# EAGLE board 20160621_DWC_LSM9DS1 (EAGLE 7.2.0)
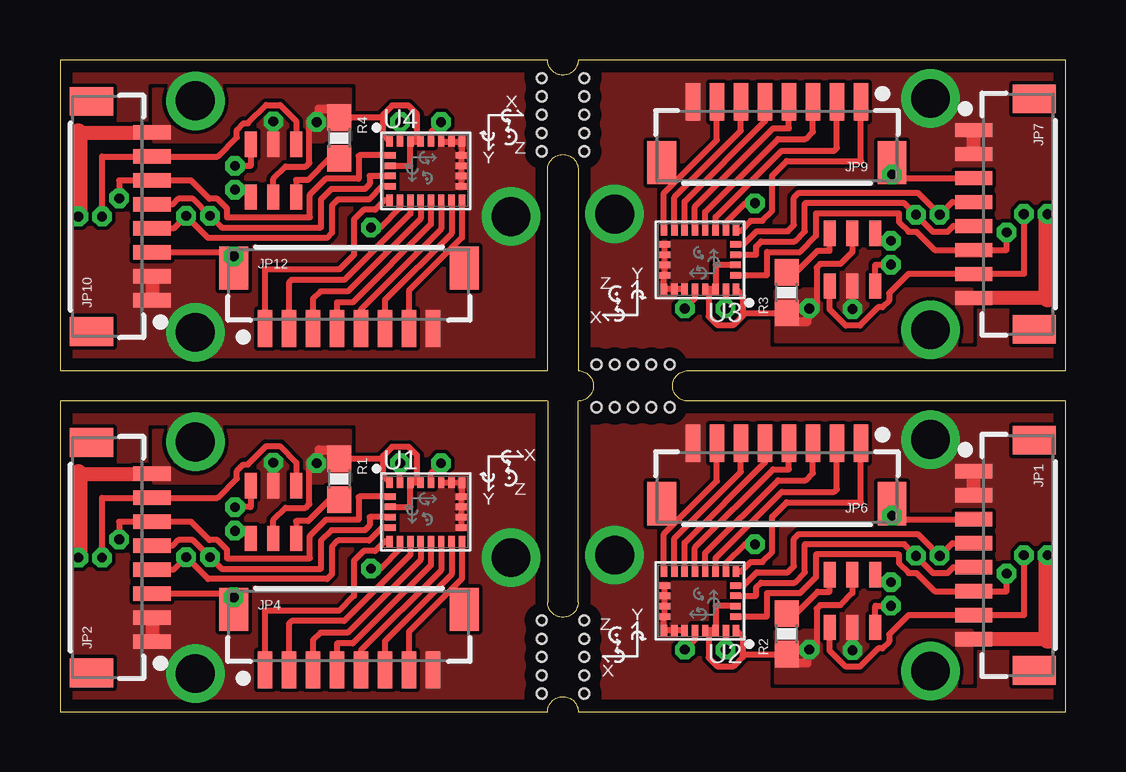
[diagram p0: board, top side]
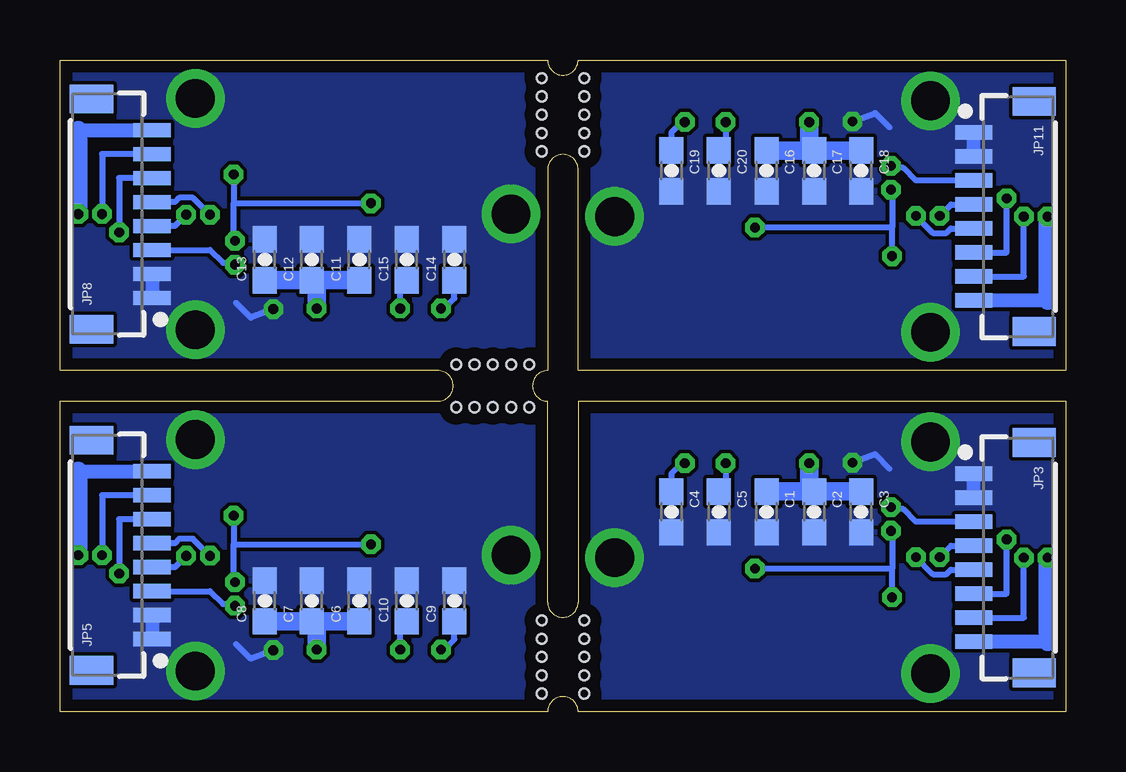
[diagram p1: board, bottom side, seen from below]

Size 41.91 x 27.18 mm. Coordinates in mm from the lower left corner, seen from the top.
Outline: 0,0 20.32,0 arc-180 21.59,0 41.91,0 41.91,12.95 26.16,12.95 arc-180 26.16,14.22 41.91,14.22 41.91,27.18 21.59,27.18 arc-180 20.32,27.18 0,27.18 0,14.22 20.32,14.22 20.32,22.61 arc-180 21.59,22.61 21.59,14.22 arc-180 21.59,12.95 21.59,4.57 arc-180 20.32,4.57 20.32,12.95 0,12.95 0,0
Copper layers (1*16): Top 0.0178mm / dielectric 59mil / Bottom 0.0178mm
Design rules "sunstone-2lyr_v1.0.0.3 *": minimum track width 6mil, minimum drill 14mil, track to track 6mil, track to pad 6mil, pad to pad 6mil, via to via 6mil, smd to smd 6mil, copper to edge 20mil, drill to drill 16mil, minimum pad ring 8mil, minimum via ring 8mil, stop-mask expansion 3mil, vias tented up to drill 0mil, thermal gap 0mil
Holes 0.41 mm at 20.07,26.42 20.07,25.65 20.07,24.89 20.07,24.13 20.07,23.37 21.84,26.42 21.84,25.65 21.84,24.89 21.84,24.13 21.84,23.37 22.35,14.48 23.11,14.48 23.88,14.48 24.64,14.48 25.4,14.48 22.35,12.7 23.11,12.7 23.88,12.7 24.64,12.7 25.4,12.7 20.07,0.76 20.07,1.52 20.07,2.29 20.07,3.05 20.07,3.81 21.84,0.76 21.84,1.52 21.84,2.29 21.84,3.05 21.84,3.81

## Footprints (pad centres in the part's own frame; a part is rotated, then mirrored left to right if it is on the bottom)
0603-CAP = smd 1.1 x 1: 1 -0.85,0; 2 0.85,0
BM08B-SRSS-TB = smd 0.6 x 1.55: 1 -3.5,0; 2 -2.5,0; 3 -1.5,0; 4 -0.5,0; 5 0.5,0; 6 1.5,0; 7 2.5,0; 8 3.5,0 | smd 1.2 x 1.8: P$9 4.8,2.525; P$10 -4.8,2.525
0603-RES = smd 1.1 x 1: 1 -0.85,0; 2 0.85,0
LGA24-8X4 = smd 0.27 x 0.45: 1 -1.505,1.225; 6 -1.505,-1.225; 7 -1.075,-1.225; 8 -0.645,-1.225; 9 -0.215,-1.225; 10 0.215,-1.225; 11 0.645,-1.225; 12 1.075,-1.225; 13 1.505,-1.225; 18 1.505,1.225; 19 1.075,1.225; 20 0.645,1.225; 21 0.215,1.225; 22 -0.215,1.225; 23 -0.645,1.225; 24 -1.075,1.225 | smd 0.45 x 0.27: 2 -1.475,0.645; 3 -1.475,0.215; 4 -1.475,-0.215; 5 -1.475,-0.645; 14 1.475,-0.645; 15 1.475,-0.215; 16 1.475,0.215; 17 1.475,0.645
SN74LVC1G175 = smd 0.5 x 1.05: P1 -0.95,-1.1; P2 0,-1.1; P3 0.95,-1.1; P4 0.95,1.1; P5 0,1.1; P6 -0.95,1.1

## Placement (x,y rotation side)
C1  0.1uF  [0603-CAP]  12.47,8.33 270 bottom
C2  0.1uF  [0603-CAP]  10.49,8.33 270 bottom
C3  10uF  [0603-CAP]  8.53,8.33 270 bottom
C4  10nF  [0603-CAP]  16.43,8.33 270 bottom
C5  0.1uF  [0603-CAP]  14.45,8.33 270 bottom
C6  0.1uF  [0603-CAP]  29.44,4.62 90 bottom
C7  0.1uF  [0603-CAP]  31.42,4.62 90 bottom
C8  10uF  [0603-CAP]  33.38,4.62 90 bottom
C9  10nF  [0603-CAP]  25.48,4.62 90 bottom
C10  0.1uF  [0603-CAP]  27.46,4.62 90 bottom
C11  0.1uF  [0603-CAP]  29.44,18.85 90 bottom
C12  0.1uF  [0603-CAP]  31.42,18.85 90 bottom
C13  10uF  [0603-CAP]  33.38,18.85 90 bottom
C14  10nF  [0603-CAP]  25.48,18.85 90 bottom
C15  0.1uF  [0603-CAP]  27.46,18.85 90 bottom
C16  0.1uF  [0603-CAP]  12.47,22.56 270 bottom
C17  0.1uF  [0603-CAP]  10.49,22.56 270 bottom
C18  10uF  [0603-CAP]  8.53,22.56 270 bottom
C19  10nF  [0603-CAP]  16.43,22.56 270 bottom
C20  0.1uF  [0603-CAP]  14.45,22.56 270 bottom
JP1  [BM08B-SRSS-TB]  38.07,6.53 270 top
JP2  [BM08B-SRSS-TB]  3.84,6.43 90 top
JP3  [BM08B-SRSS-TB]  3.84,6.43 270 bottom
JP4  [BM08B-SRSS-TB]  12.04,1.75 0 top
JP5  [BM08B-SRSS-TB]  38.07,6.53 90 bottom
JP6  [BM08B-SRSS-TB]  29.87,11.2 180 top
JP7  [BM08B-SRSS-TB]  38.07,20.75 270 top
JP8  [BM08B-SRSS-TB]  38.07,20.75 90 bottom
JP9  [BM08B-SRSS-TB]  29.87,25.43 180 top
JP10  [BM08B-SRSS-TB]  3.84,20.65 90 top
JP11  [BM08B-SRSS-TB]  3.84,20.65 270 bottom
JP12  [BM08B-SRSS-TB]  12.04,15.98 0 top
R1  [0603-RES]  11.63,9.7 270 top
R2  [0603-RES]  30.28,3.25 90 top
R3  [0603-RES]  30.28,17.48 90 top
R4  [0603-RES]  11.63,23.93 270 top
U1  LSM9DS1  [LGA24-8X4]  15.24,8.33 0 top
U2  LSM9DS1  [LGA24-8X4]  26.67,4.62 180 top
U3  LSM9DS1  [LGA24-8X4]  26.67,18.85 180 top
U4  LSM9DS1  [LGA24-8X4]  15.24,22.56 0 top
U$1  SN74LVC1G175  [SN74LVC1G175]  8.89,8.33 180 top
U$2  SN74LVC1G175  [SN74LVC1G175]  33.02,4.62 0 top
U$3  SN74LVC1G175  [SN74LVC1G175]  33.02,18.85 0 top
U$4  SN74LVC1G175  [SN74LVC1G175]  8.89,22.56 180 top

## Library data of the parts
C1-C20 R1-R4 = SparkFun-Passives
JP1-JP12 = SparkFun-Connectors
U1-U4 = SparkFun-Sensors; PROD_ID: IC-12536
U$1-U$4 = CSL_Components

## Nets
CS_A/G: JP2.3 U1.7 U$1.P4
CS_A/G1: JP1.3 U2.7 U$2.P4
CS_A/G2: JP7.3 U3.7 U$3.P4
CS_A/G3: JP10.3 U4.7 U$4.P4
CS_M: JP4.2 U1.8
CS_M1: JP6.2 U2.8
CS_M2: JP9.2 U3.8
CS_M3: JP12.2 U4.8
CSCLK: JP2.7 JP3.7 U$1.P1
CSCLK1: JP1.7 JP5.7 U$2.P1
CSCLK2: JP7.7 JP8.7 U$3.P1
CSCLK3: JP10.7 JP11.7 U$4.P1
D: JP3.3 U$1.P3
D1: JP5.3 U$2.P3
D2: JP8.3 U$3.P3
D3: JP11.3 U$4.P3
DEN_A/G: JP4.7 U1.13
DEN_A/G1: JP6.7 U2.13
DEN_A/G2: JP9.7 U3.13
DEN_A/G3: JP12.7 U4.13
DRDY_M: JP4.3 U1.9
DRDY_M1: JP6.3 U2.9
DRDY_M2: JP9.3 U3.9
DRDY_M3: JP12.3 U4.9
GND: C1.2 C2.2 C3.2 C4.2 C5.2 JP2.1 JP2.2 JP3.1 JP3.2 JP4.8 U1.14 U1.15 U1.16 U1.17 U1.18 U1.19 U1.20 U$1.P2
GND1: C6.2 C7.2 C8.2 C9.2 C10.2 JP1.1 JP1.2 JP5.1 JP5.2 JP6.8 U2.14 U2.15 U2.16 U2.17 U2.18 U2.19 U2.20 U$2.P2
GND2: C11.2 C12.2 C13.2 C14.2 C15.2 JP7.1 JP7.2 JP8.1 JP8.2 JP9.8 U3.14 U3.15 U3.16 U3.17 U3.18 U3.19 U3.20 U$3.P2
GND3: C16.2 C17.2 C18.2 C19.2 C20.2 JP10.1 JP10.2 JP11.1 JP11.2 JP12.8 U4.14 U4.15 U4.16 U4.17 U4.18 U4.19 U4.20 U$4.P2
INT1_A/G: JP4.5 U1.11
INT1_A/G1: JP6.5 U2.11
INT1_A/G2: JP9.5 U3.11
INT1_A/G3: JP12.5 U4.11
INT2_A/G: JP4.6 U1.12
INT2_A/G1: JP6.6 U2.12
INT2_A/G2: JP9.6 U3.12
INT2_A/G3: JP12.6 U4.12
INT_M: JP4.4 U1.10
INT_M1: JP6.4 U2.10
INT_M2: JP9.4 U3.10
INT_M3: JP12.4 U4.10
N$1: R1.2 U$1.P6
N$2: C4.1 U1.21
N$3: C5.1 U1.24
N$4: C9.1 U2.21
N$5: C10.1 U2.24
N$6: R2.2 U$2.P6
N$7: C14.1 U3.21
N$8: C15.1 U3.24
N$9: R3.2 U$3.P6
N$10: C19.1 U4.21
N$11: C20.1 U4.24
N$12: R4.2 U$4.P6
SCL: JP2.6 JP3.6 U1.2
SCL1: JP1.6 JP5.6 U2.2
SCL2: JP7.6 JP8.6 U3.2
SCL3: JP10.6 JP11.6 U4.2
SDA: JP2.5 JP3.5 U1.4
SDA1: JP1.5 JP5.5 U2.4
SDA2: JP7.5 JP8.5 U3.4
SDA3: JP10.5 JP11.5 U4.4
SDO_A/G: JP2.4 JP3.4 U1.5
SDO_A/G1: JP1.4 JP5.4 U2.5
SDO_A/G2: JP7.4 JP8.4 U3.5
SDO_A/G3: JP10.4 JP11.4 U4.5
SDO_M: JP4.1 U1.6
SDO_M1: JP6.1 U2.6
SDO_M2: JP9.1 U3.6
SDO_M3: JP12.1 U4.6
VDD: C1.1 C2.1 C3.1 JP2.8 JP3.8 R1.1 U1.1 U1.3 U1.22 U1.23 U$1.P5
VDD1: C6.1 C7.1 C8.1 JP1.8 JP5.8 R2.1 U2.1 U2.3 U2.22 U2.23 U$2.P5
VDD2: C11.1 C12.1 C13.1 JP7.8 JP8.8 R3.1 U3.1 U3.3 U3.22 U3.23 U$3.P5
VDD3: C16.1 C17.1 C18.1 JP10.8 JP11.8 R4.1 U4.1 U4.3 U4.22 U4.23 U$4.P5

## Tracks (layer width: path | path; a pad name or v marks a point on that pad's centre or on a via)
CS_A/G  (via drill 0.41)
  Top 0.254: 3.86,4.9 JP2.3 7.09,4.93 v7.24,4.78 | U1.7 14.16,6.77 13.36,5.97 v12.95,5.97 | U$1.P4 7.63,7.54 v7.29,7.54
  Bottom 0.254: v7.24,4.78 7.24,5.97 | 7.24,5.97 v12.95,5.97 | v7.29,7.54 7.24,7.49 7.24,5.97
CS_A/G1  (via drill 0.41)
  Top 0.254: 38.05,8.05 JP1.3 34.82,8.03 v34.67,8.18 | U2.7 27.75,6.18 28.55,6.99 v28.96,6.99 | U$2.P4 34.28,5.41 v34.62,5.41
  Bottom 0.254: v34.67,8.18 34.67,6.99 | 34.67,6.99 v28.96,6.99 | v34.62,5.41 34.67,5.46 34.67,6.99
CS_A/G2  (via drill 0.41)
  Top 0.254: 38.05,22.28 JP7.3 34.82,22.25 v34.67,22.4 | U3.7 27.75,20.4 28.55,21.21 v28.96,21.21 | U$3.P4 34.28,19.63 v34.62,19.63
  Bottom 0.254: v34.67,22.4 34.67,21.21 | 34.67,21.21 v28.96,21.21 | v34.62,19.63 34.67,19.68 34.67,21.21
CS_A/G3  (via drill 0.41)
  Top 0.254: 3.86,19.13 JP10.3 7.09,19.15 v7.24,19 | U4.7 14.16,21 13.36,20.19 v12.95,20.19 | U$4.P4 7.63,21.77 v7.29,21.77
  Bottom 0.254: v7.24,19 7.24,20.19 | 7.24,20.19 v12.95,20.19 | v7.29,21.77 7.24,21.72 7.24,20.19
CS_M
  Top 0.254: U1.8 14.6,6.54 11.84,3.79 9.65,3.79 9.54,3.67 JP4.2
CS_M1
  Top 0.254: U2.8 27.32,6.41 30.07,9.17 32.26,9.17 32.37,9.28 JP6.2
CS_M2
  Top 0.254: U3.8 27.32,20.64 30.07,23.39 32.26,23.39 32.37,23.51 JP9.2
CS_M3
  Top 0.254: U4.8 14.6,20.77 11.84,18.01 9.65,18.01 9.54,17.9 JP12.2
CSCLK  (via drill 0.41)
  Top 0.254: v1.75,6.43 1.75,8.93 JP2.7 6.56,8.93 7.37,9.73 7.37,10.03 7.64,10.31 7.82,10.31 8.59,11.07 9.17,11.07 9.84,10.4 U$1.P1
  Bottom 0.254: JP3.7 1.75,3.93 v1.75,6.43
CSCLK1  (via drill 0.41)
  Top 0.254: v40.16,6.53 40.16,4.03 JP1.7 35.35,4.03 34.54,3.23 34.54,2.92 34.27,2.64 34.09,2.64 33.33,1.88 32.74,1.88 32.07,2.55 U$2.P1
  Bottom 0.254: JP5.7 40.16,9.03 v40.16,6.53
CSCLK2  (via drill 0.41)
  Top 0.254: v40.16,20.75 40.16,18.25 JP7.7 35.35,18.25 34.54,17.45 34.54,17.14 34.27,16.87 34.09,16.87 33.33,16.1 32.74,16.1 32.07,16.77 U$3.P1
  Bottom 0.254: JP8.7 40.16,23.25 v40.16,20.75
CSCLK3  (via drill 0.41)
  Top 0.254: v1.75,20.65 1.75,23.15 JP10.7 6.56,23.15 7.37,23.95 7.37,24.26 7.64,24.54 7.82,24.54 8.59,25.3 9.17,25.3 9.84,24.63 U$4.P1
  Bottom 0.254: JP11.7 1.75,18.15 v1.75,20.65
D  (via drill 0.41 pad 0.41)
  Top 0.254: U$1.P3 7.94,8.53 v7.29,8.53
  Bottom 0.254: JP3.3 6.25,7.93 6.78,8.46 7.21,8.46 v7.29,8.53
D1  (via drill 0.41 pad 0.41)
  Top 0.254: U$2.P3 33.97,4.42 v34.62,4.42
  Bottom 0.254: JP5.3 35.66,5.03 35.13,4.5 34.7,4.5 v34.62,4.42
D2  (via drill 0.41 pad 0.41)
  Top 0.254: U$3.P3 33.97,18.64 v34.62,18.64
  Bottom 0.254: JP8.3 35.66,19.25 35.13,18.72 34.7,18.72 v34.62,18.64
D3  (via drill 0.41 pad 0.41)
  Top 0.254: U$4.P3 7.94,22.76 v7.29,22.76
  Bottom 0.254: JP11.3 6.25,22.15 6.78,22.68 7.21,22.68 v7.29,22.76
DEN_A/G
  Top 0.254: U1.13 16.75,5.54 14.54,3.34 JP4.7
DEN_A/G1
  Top 0.254: U2.13 25.16,7.41 27.37,9.62 JP6.7
DEN_A/G2
  Top 0.254: U3.13 25.16,21.63 27.37,23.84 JP9.7
DEN_A/G3
  Top 0.254: U4.13 16.75,19.77 14.54,17.56 JP12.7
DRDY_M
  Top 0.254: U1.9 15.03,6.34 11.99,3.3 10.85,3.3 10.54,3 JP4.3
DRDY_M1
  Top 0.254: U2.9 26.89,6.62 29.92,9.65 31.06,9.65 31.37,9.96 JP6.3
DRDY_M2
  Top 0.254: U3.9 26.89,20.84 29.92,23.88 31.06,23.88 31.37,24.18 JP9.3
DRDY_M3
  Top 0.254: U4.9 15.03,20.56 11.99,17.53 10.85,17.53 10.54,17.22 JP12.3
GND  (via drill 0.41, 1.61 pad 2.44)
  Top 0.254: U1.20 U1.19 U1.18 16.75,9.01 U1.17 U1.16 U1.15 U1.14 | U$1.P2 v8.89,10.39 8.89,10.46
  Top 0.584: JP2.2 JP2.1
  Bottom 0.254: v8.89,10.39 7.95,10.74 7.34,10.13
  Bottom 0.584: JP3.2 JP3.1
  other vias: 5.64,1.6 5.64,11.25 18.8,6.43
  pour Bottom (rank 2): -0.33,13.21 20.42,13.18 20.6,-0.3 -0.15,-0.28
  pour Top (rank 2): 20.45,13.08 -0.41,13.21 -0.25,-0.18 20.6,-0.3
GND1  (via drill 0.41, 1.61 pad 2.44)
  Top 0.254: U2.20 U2.19 U2.18 25.16,3.95 U2.17 U2.16 U2.15 U2.14 | U$2.P2 v33.02,2.56 33.02,2.49
  Top 0.584: JP1.2 JP1.1
  Bottom 0.254: v33.02,2.56 33.96,2.21 34.57,2.82
  Bottom 0.584: JP5.2 JP5.1
  other vias: 36.27,11.35 36.27,1.7 23.11,6.53
  pour Bottom (rank 2): 42.24,-0.25 21.49,-0.23 21.31,13.26 42.06,13.23
  pour Top (rank 2): 21.46,-0.13 42.32,-0.25 42.16,13.13 21.31,13.26
GND2  (via drill 0.41, 1.61 pad 2.44)
  Top 0.254: U3.20 U3.19 U3.18 25.16,18.17 U3.17 U3.16 U3.15 U3.14 | U$3.P2 v33.02,16.79 33.02,16.71
  Top 0.584: JP7.2 JP7.1
  Bottom 0.254: v33.02,16.79 33.96,16.43 34.57,17.04
  Bottom 0.584: JP8.2 JP8.1
  other vias: 36.27,25.58 36.27,15.93 23.11,20.75
  pour Bottom (rank 2): 42.24,13.97 21.49,14 21.31,27.48 42.06,27.46
  pour Top (rank 2): 21.46,14.1 42.32,13.97 42.16,27.36 21.31,27.48
GND3  (via drill 0.41, 1.61 pad 2.44)
  Top 0.254: U4.20 U4.19 U4.18 16.75,23.23 U4.17 U4.16 U4.15 U4.14 | U$4.P2 v8.89,24.61 8.89,24.69
  Top 0.584: JP10.2 JP10.1
  Bottom 0.254: v8.89,24.61 7.95,24.97 7.34,24.36
  Bottom 0.584: JP11.2 JP11.1
  other vias: 5.64,15.82 5.64,25.48 18.8,20.65
  pour Bottom (rank 2): -0.33,27.43 20.42,27.41 20.6,13.92 -0.15,13.94
  pour Top (rank 2): 20.45,27.3 -0.41,27.43 -0.25,14.05 20.6,13.92
INT1_A/G
  Top 0.254: U1.11 15.88,5.9 12.54,2.56 JP4.5
INT1_A/G1
  Top 0.254: U2.11 26.02,7.05 29.37,10.4 JP6.5
INT1_A/G2
  Top 0.254: U3.11 26.02,21.27 29.37,24.62 JP9.5
INT1_A/G3
  Top 0.254: U4.11 15.88,20.13 12.54,16.78 JP12.5
INT2_A/G
  Top 0.254: U1.12 16.32,5.72 13.54,2.95 JP4.6
INT2_A/G1
  Top 0.254: U2.12 25.59,7.23 28.37,10.01 JP6.6
INT2_A/G2
  Top 0.254: U3.12 25.59,21.45 28.37,24.23 JP9.6
INT2_A/G3
  Top 0.254: U4.12 16.32,19.95 13.54,17.17 JP12.6
INT_M
  Top 0.254: U1.10 15.46,6.11 12.19,2.85 11.53,2.85 11.54,2.84 JP4.4
INT_M1
  Top 0.254: U2.10 26.45,6.85 29.72,10.11 30.38,10.11 30.37,10.12 JP6.4
INT_M2
  Top 0.254: U3.10 26.45,21.07 29.72,24.33 30.38,24.33 30.37,24.34 JP9.4
INT_M3
  Top 0.254: U4.10 15.46,20.33 12.19,17.07 11.53,17.07 11.54,17.06 JP12.4
N$1
  Top 0.254: R1.2 11.24,8.85 10.34,7.95 9.84,7.95 U$1.P6
N$2  (via drill 0.41)
  Top 0.254: U1.21 15.46,9.94 v15.88,10.36
  Bottom 0.254: C4.1 16.43,9.93 16,10.36 v15.88,10.36
N$3  (via drill 0.41)
  Top 0.254: U1.24 v14.16,10.36 v14.17,10.36
  Bottom 0.254: v14.17,10.36 14.17,9.18 C5.1
N$4  (via drill 0.41)
  Top 0.254: U2.21 26.45,3.01 v26.04,2.59
  Bottom 0.254: C9.1 25.48,3.02 25.91,2.59 v26.04,2.59
N$5  (via drill 0.41)
  Top 0.254: U2.24 v27.75,2.59 v27.74,2.59
  Bottom 0.254: v27.74,2.59 27.74,3.77 C10.1
N$6
  Top 0.254: R2.2 30.67,4.1 31.57,5 32.07,5 U$2.P6
N$7  (via drill 0.41)
  Top 0.254: U3.21 26.45,17.23 v26.04,16.82
  Bottom 0.254: C14.1 25.48,17.25 25.91,16.82 v26.04,16.82
N$8  (via drill 0.41)
  Top 0.254: U3.24 v27.75,16.82 v27.74,16.82
  Bottom 0.254: v27.74,16.82 27.74,18 C15.1
N$9
  Top 0.254: R3.2 30.67,18.32 31.57,19.23 32.07,19.23 U$3.P6
N$10  (via drill 0.41)
  Top 0.254: U4.21 15.46,24.17 v15.88,24.59
  Bottom 0.254: C19.1 16.43,24.16 16,24.59 v15.88,24.59
N$11  (via drill 0.41)
  Top 0.254: U4.24 v14.16,24.59 v14.17,24.59
  Bottom 0.254: v14.17,24.59 14.17,23.41 C20.1
N$12
  Top 0.254: R4.2 11.24,23.08 10.34,22.17 9.84,22.17 U$4.P6
SCL  (via drill 0.41)
  Top 0.254: U1.2 12.47,8.98 12.45,8.95 12.45,8 11.07,8 10.41,7.34 10.41,6.4 6.96,6.4 6.96,6.76 6.55,7.16 6.22,7.16 5.46,7.93 JP2.6 2.46,7.93 v2.46,7.19
  Bottom 0.254: JP3.6 2.46,4.93 v2.46,7.19
SCL1  (via drill 0.41)
  Top 0.254: U2.2 29.44,3.98 29.46,4 29.46,4.95 30.84,4.95 31.5,5.61 31.5,6.55 34.95,6.55 34.95,6.2 35.36,5.79 35.69,5.79 36.45,5.03 JP1.6 39.45,5.03 v39.45,5.77
  Bottom 0.254: JP5.6 39.45,8.03 v39.45,5.77
SCL2  (via drill 0.41)
  Top 0.254: U3.2 29.44,18.2 29.46,18.23 29.46,19.18 30.84,19.18 31.5,19.84 31.5,20.78 34.95,20.78 34.95,20.42 35.36,20.02 35.69,20.02 36.45,19.25 JP7.6 39.45,19.25 v39.45,19.99
  Bottom 0.254: JP8.6 39.45,22.25 v39.45,19.99
SCL3  (via drill 0.41)
  Top 0.254: U4.2 12.47,23.2 12.45,23.18 12.45,22.23 11.07,22.23 10.41,21.57 10.41,20.62 6.96,20.62 6.96,20.98 6.55,21.39 6.22,21.39 5.46,22.15 JP10.6 2.46,22.15 v2.46,21.41
  Bottom 0.254: JP11.6 2.46,19.15 v2.46,21.41
SDA  (via drill 0.41)
  Top 0.254: U1.4 12.9,8.12 12.9,7.77 12.7,7.57 11.3,7.57 10.87,7.14 10.87,5.97 6.73,5.97 v6.25,6.45 5.54,7.16 4.93,7.16 4.69,6.93 JP2.5
  Bottom 0.254: v6.25,6.45 5.54,5.74 4.98,5.74 4.79,5.93 JP3.5
SDA1  (via drill 0.41)
  Top 0.254: U2.4 29.01,4.84 29.01,5.18 29.21,5.38 30.61,5.38 31.04,5.82 31.04,6.99 35.18,6.99 v35.66,6.5 36.37,5.79 36.98,5.79 37.22,6.03 JP1.5
  Bottom 0.254: v35.66,6.5 36.37,7.21 36.93,7.21 37.12,7.03 JP5.5
SDA2  (via drill 0.41)
  Top 0.254: U3.4 29.01,19.06 29.01,19.41 29.21,19.61 30.61,19.61 31.04,20.04 31.04,21.21 35.18,21.21 v35.66,20.73 36.37,20.02 36.98,20.02 37.22,20.25 JP7.5
  Bottom 0.254: v35.66,20.73 36.37,21.44 36.93,21.44 37.12,21.25 JP8.5
SDA3  (via drill 0.41)
  Top 0.254: U4.4 12.9,22.34 12.9,22 12.7,21.79 11.3,21.79 10.87,21.36 10.87,20.19 6.73,20.19 v6.25,20.68 5.54,21.39 4.93,21.39 4.69,21.15 JP10.5
  Bottom 0.254: v6.25,20.68 5.54,19.96 4.98,19.96 4.79,20.15 JP11.5
SDO_A/G  (via drill 0.41)
  Top 0.254: U1.5 13.43,7.69 12.88,7.14 11.58,7.14 11.33,6.88 11.33,5.74 11.12,5.54 6.17,5.54 v5.26,6.45 4.73,5.93 JP2.4
  Bottom 0.254: v5.26,6.45 4.78,6.93 JP3.4
SDO_A/G1  (via drill 0.41)
  Top 0.254: U2.5 28.48,5.27 29.03,5.82 30.33,5.82 30.58,6.07 30.58,7.21 30.79,7.42 35.74,7.42 v36.65,6.5 37.18,7.03 JP1.4
  Bottom 0.254: v36.65,6.5 37.13,6.03 JP5.4
SDO_A/G2  (via drill 0.41)
  Top 0.254: U3.5 28.48,19.49 29.03,20.04 30.33,20.04 30.58,20.3 30.58,21.44 30.79,21.64 35.74,21.64 v36.65,20.73 37.18,21.25 JP7.4
  Bottom 0.254: v36.65,20.73 37.13,20.25 JP8.4
SDO_A/G3  (via drill 0.41)
  Top 0.254: U4.5 13.43,21.91 12.88,21.36 11.58,21.36 11.33,21.11 11.33,19.96 11.12,19.76 6.17,19.76 v5.26,20.68 4.73,20.15 JP10.4
  Bottom 0.254: v5.26,20.68 4.78,21.15 JP11.4
SDO_M
  Top 0.254: U1.6 13.53,7.11 13.13,6.71 12.65,6.71 12.24,6.3 12.24,4.83 11.63,4.22 8.54,4.22 JP4.1
SDO_M1
  Top 0.254: U2.6 28.38,5.85 28.78,6.25 29.26,6.25 29.67,6.66 29.67,8.13 30.28,8.74 33.37,8.74 JP6.1
SDO_M2
  Top 0.254: U3.6 28.38,20.07 28.78,20.47 29.26,20.47 29.67,20.88 29.67,22.35 30.28,22.96 33.37,22.96 JP9.1
SDO_M3
  Top 0.254: U4.6 13.53,21.33 13.13,20.93 12.65,20.93 12.24,20.52 12.24,19.05 11.63,18.44 8.54,18.44 JP12.1
VDD  (via drill 0.41)
  Top 0.254: U1.22 U1.23 | U1.3 14.6,8.55 U1.23 | U1.23 14.88,9.56 14.88,10.69 14.53,11.05 13.84,11.05 13.46,10.67 13.46,10.55 | U1.1 13.46,9.83 13.46,10.55 | U$1.P5 8.89,8 9.4,8.51 10.24,8.51 10.39,8.66 10.39,10.46 v10.69,10.36 | 13.46,10.55 R1.1
  Top 0.381: R1.1 11.58,10.92 10.79,10.92 10.82,10.9 v10.69,10.36
  Top 0.584: 0.76,9.93 JP2.8
  Top 0.762: v0.76,6.43 0.76,9.93
  Bottom 0.584: 0.76,2.92 0.76,2.93 JP3.8
  Bottom 0.762: C2.1 C3.1 | C2.1 C1.1 | C2.1 10.69,9.22 v10.69,10.36 | v0.76,6.43 0.76,2.92
  pour Top: 3.91,11.73 12.09,11.73 12.09,9.55 3.91,9.55
VDD1  (via drill 0.41)
  Top 0.254: U2.22 U2.23 | U2.3 27.32,4.41 U2.23 | U2.23 27.03,3.4 27.03,2.26 27.38,1.91 28.07,1.91 28.45,2.29 28.45,2.4 | U2.1 28.45,3.12 28.45,2.4 | U$2.P5 33.02,4.95 32.51,4.45 31.67,4.45 31.52,4.29 31.52,2.49 v31.22,2.59 | 28.45,2.4 R2.1
  Top 0.381: R2.1 30.33,2.03 31.11,2.03 31.09,2.06 v31.22,2.59
  Top 0.584: 41.15,3.02 41.15,3.03 JP1.8
  Top 0.762: v41.15,6.53 41.15,3.02
  Bottom 0.584: 41.15,10.03 JP5.8
  Bottom 0.762: C7.1 C8.1 | C7.1 C6.1 | C7.1 31.22,3.73 v31.22,2.59 | v41.15,6.53 41.15,10.03
  pour Top: 38,1.22 29.82,1.22 29.82,3.4 38,3.4
VDD2  (via drill 0.41)
  Top 0.254: U3.22 U3.23 | U3.3 27.32,18.63 U3.23 | U3.23 27.03,17.62 27.03,16.48 27.38,16.13 28.07,16.13 28.45,16.51 28.45,16.62 | U3.1 28.45,17.35 28.45,16.62 | U$3.P5 33.02,19.18 32.51,18.67 31.67,18.67 31.52,18.52 31.52,16.71 v31.22,16.82 | 28.45,16.62 R3.1
  Top 0.381: R3.1 30.33,16.26 31.11,16.26 31.09,16.28 v31.22,16.82
  Top 0.584: 41.15,17.25 JP7.8
  Top 0.762: v41.15,20.75 41.15,17.25
  Bottom 0.584: 41.15,24.26 41.15,24.25 JP8.8
  Bottom 0.762: C12.1 C13.1 | C12.1 C11.1 | C12.1 31.22,17.96 v31.22,16.82 | v41.15,20.75 41.15,24.26
  pour Top: 38,15.44 29.82,15.44 29.82,17.63 38,17.63
VDD3  (via drill 0.41)
  Top 0.254: U4.22 U4.23 | U4.3 14.6,22.77 U4.23 | U4.23 14.88,23.78 14.88,24.92 14.53,25.27 13.84,25.27 13.46,24.89 13.46,24.78 | U4.1 13.46,24.05 13.46,24.78 | U$4.P5 8.89,22.23 9.4,22.73 10.24,22.73 10.39,22.89 10.39,24.69 v10.69,24.59 | 13.46,24.78 R4.1
  Top 0.381: R4.1 11.58,25.15 10.79,25.15 10.82,25.12 v10.69,24.59
  Top 0.584: 0.76,24.16 0.76,24.15 JP10.8
  Top 0.762: v0.76,20.65 0.76,24.16
  Bottom 0.584: 0.76,17.14 0.76,17.15 JP11.8
  Bottom 0.762: C17.1 C18.1 | C17.1 C16.1 | C17.1 10.69,23.44 v10.69,24.59 | v0.76,20.65 0.76,17.14
  pour Top: 3.91,25.96 12.09,25.96 12.09,23.77 3.91,23.77

## Text on the board
tPlace: X | Z | Y | Z | Y | X | X | Y | Z | Z | Y | X